# EAGLE board arduino_uno_with_rs232 (EAGLE 6.1)
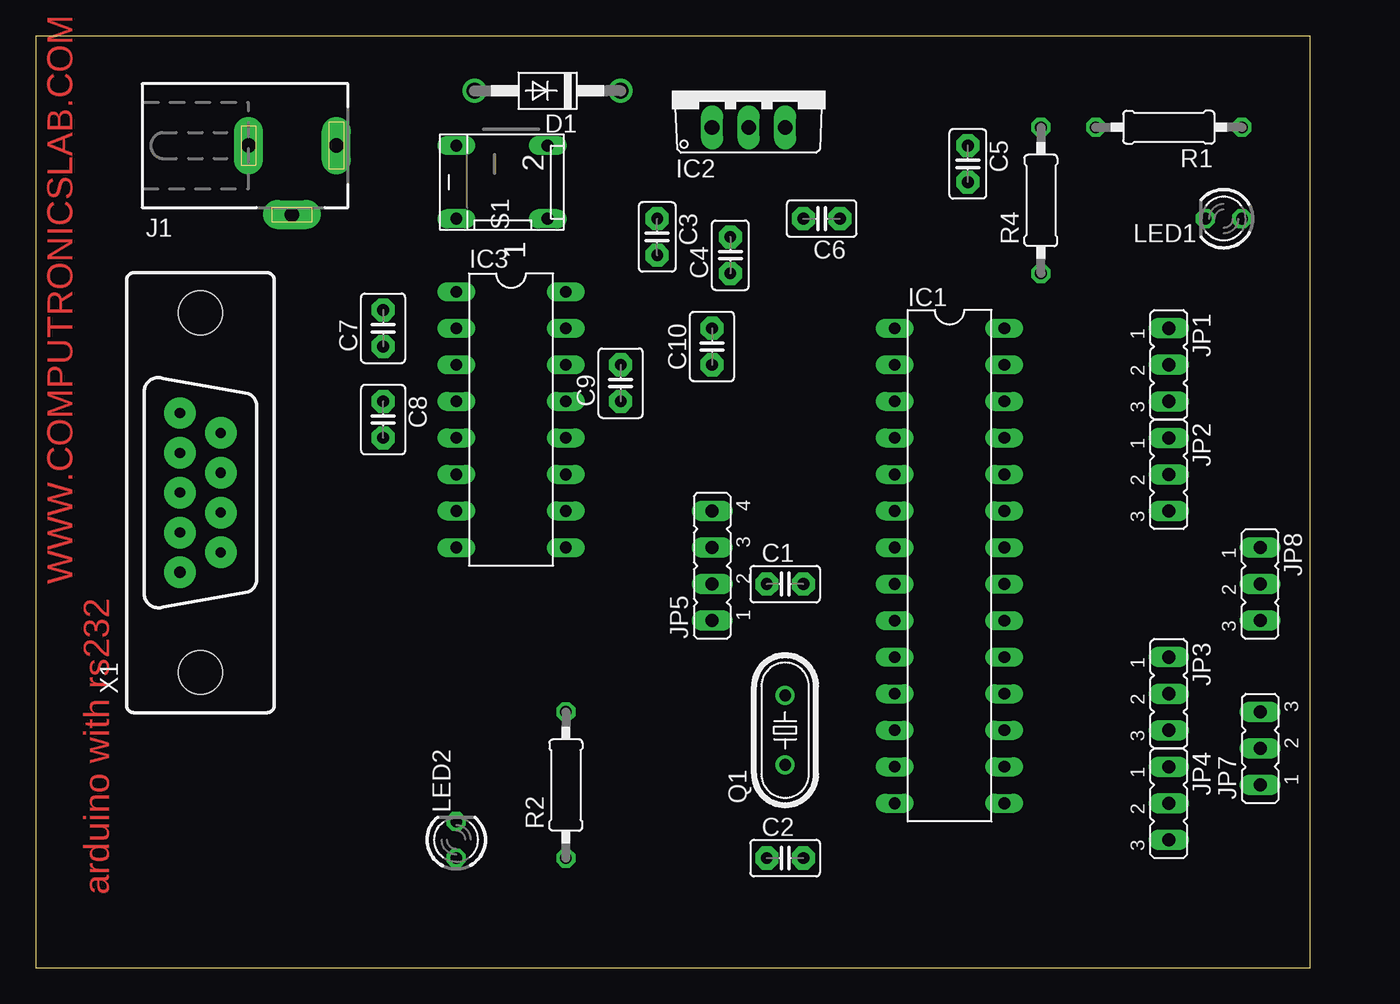
[diagram p0: board, top side]
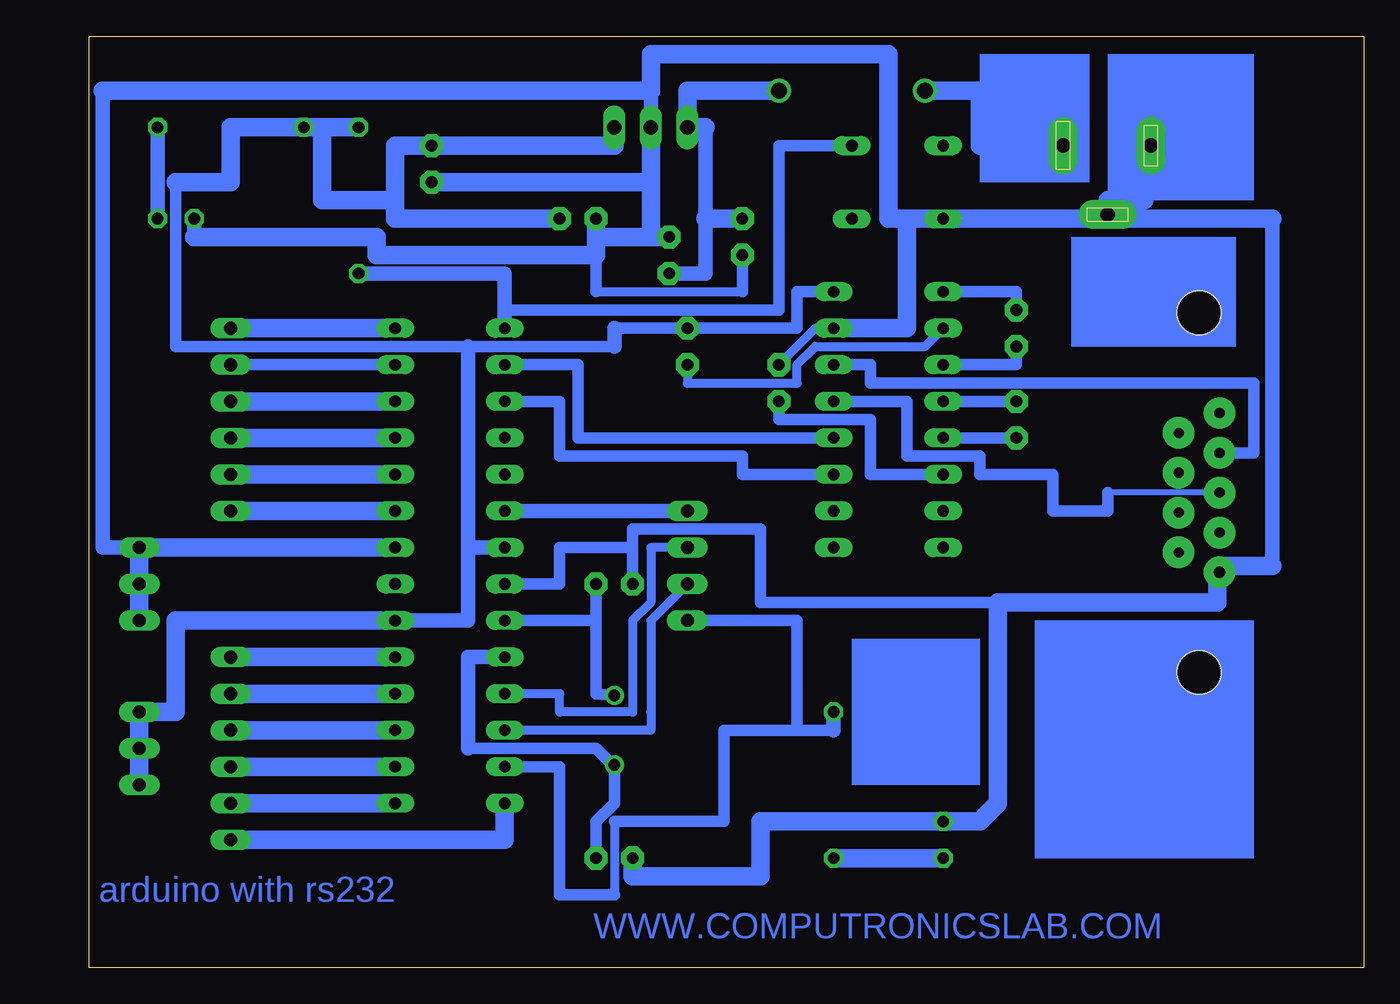
[diagram p1: board, bottom side, seen from below]

Size 88.57 x 64.76 mm. Coordinates in mm from the lower left corner, seen from the top.
Outline: 0,0 88.57,0 88.57,64.76 0,64.76 0,0
Copper layers (1*16): Top 0.035mm / dielectric 1.5mm / Bottom 0.035mm
Design rules: minimum track width 10mil, minimum drill 24mil, track to track 8mil, track to pad 8mil, pad to pad 8mil, via to via 8mil, smd to smd 8mil, copper to edge 40mil, drill to drill 8mil, minimum pad ring 10mil, minimum via ring 8mil, stop-mask expansion 4mil, vias tented up to drill 0mil, thermal gap 10mil

## Footprints (pad centres in the part's own frame; a part is rotated, then mirrored left to right if it is on the bottom)
C2.5-2 = drill 0.813 pad 1.6 octagon: 1 -1.27,0; 2 1.27,0
C2.5-3 = drill 0.813 pad 1.6 octagon: 1 -1.27,0; 2 1.27,0
DO41-10 = drill 1.118: A 5.08,0; C -5.08,0
DIL28-3 = drill 0.813 long: 1 -16.51,-3.81; 2 -13.97,-3.81; 3 -11.43,-3.81; 4 -8.89,-3.81; 5 -6.35,-3.81; 6 -3.81,-3.81; 7 -1.27,-3.81; 8 1.27,-3.81; 9 3.81,-3.81; 10 6.35,-3.81; 11 8.89,-3.81; 12 11.43,-3.81; 13 13.97,-3.81; 14 16.51,-3.81; 15 16.51,3.81; 16 13.97,3.81; 17 11.43,3.81; 18 8.89,3.81; 19 6.35,3.81; 20 3.81,3.81; 21 1.27,3.81; 22 -1.27,3.81; 23 -3.81,3.81; 24 -6.35,3.81; 25 -8.89,3.81; 26 -11.43,3.81; 27 -13.97,3.81; 28 -16.51,3.81
TO220V = drill 1.016 long: 1 -2.54,-2.54; 2 0,-2.54; 3 2.54,-2.54
DIL16 = drill 0.813 long: 1 -8.89,-3.81; 2 -6.35,-3.81; 3 -3.81,-3.81; 4 -1.27,-3.81; 5 1.27,-3.81; 6 3.81,-3.81; 7 6.35,-3.81; 8 8.89,-3.81; 9 8.89,3.81; 10 6.35,3.81; 11 3.81,3.81; 12 1.27,3.81; 13 -1.27,3.81; 14 -3.81,3.81; 15 -6.35,3.81; 16 -8.89,3.81
DCJ0303 = drill 1 pad 2 long: 1 0,3.1; 2 4.8,0; 3 0,-3
JP2 = drill 0.914 long: 1 -2.54,0; 2 0,0; 3 2.54,0
JP4 = drill 0.914 long: 1 -3.81,0; 2 -1.27,0; 3 1.27,0; 4 3.81,0
LED3MM = drill 0.813 octagon: A -1.27,0; K 1.27,0
HC49/S = drill 0.813: 1 -2.413,0; 2 2.413,0
0207/10 = drill 0.813 octagon: 1 -5.08,0; 2 5.08,0
DP-02 = drill 0.813 long: 1 -2.54,-2.54; 2 2.54,-2.54; 3 2.54,3.81; 4 -2.54,3.81
H2M09ST = drill 0.8 pad 2.184: 1 -5.537,1.422 | drill 0.7 pad 2.184: 2 -2.769,1.422; 3 0,1.422; 4 2.769,1.422; 5 5.537,1.422; 6 -4.153,-1.422; 7 -1.384,-1.422; 8 1.384,-1.422; 9 4.153,-1.422 | hole 3.048: -12.497,0; 12.497,0

## Placement (x,y rotation side)
C1  22pf  [C2.5-2]  52.07,26.67 0 top
C2  22pf  [C2.5-2]  52.07,7.62 0 top
C3  100UF  [C2.5-2]  43.18,50.8 270 top
C4  0.1uf  [C2.5-2]  48.26,49.53 90 top
C5  0.1uf  [C2.5-2]  64.77,55.88 270 top
C6  4.7uf  [C2.5-2]  54.61,52.07 180 top
C7  0.1uf  [C2.5-3]  24.13,44.45 90 top
C8  0.1uf  [C2.5-3]  24.13,38.1 270 top
C9  0.1uf  [C2.5-3]  40.64,40.64 90 top
C10  0.1uf  [C2.5-3]  46.99,43.18 90 top
D1  1N4007  [DO41-10]  35.56,60.96 180 top
IC1  ATMEGA328  [DIL28-3]  63.5,27.94 270 top
IC2  7805  [TO220V]  49.53,60.96 0 top
IC3  MAX232  [DIL16]  33.02,38.1 270 top
J1  [DCJ0303]  17.78,57.15 270 top
JP1  [JP2]  78.74,41.91 270 top
JP2  [JP2]  78.74,34.29 270 top
JP3  [JP2]  78.74,19.05 270 top
JP4  [JP2]  78.74,11.43 270 top
JP5  [JP4]  46.99,27.94 90 top
JP7  [JP2]  85.09,15.24 90 top
JP8  [JP2]  85.09,26.67 270 top
LED1  [LED3MM]  82.55,52.07 180 top
LED2  [LED3MM]  29.21,8.89 90 top
Q1  12MHZ  [HC49/S]  52.07,16.51 90 top
R1  220R  [0207/10]  78.74,58.42 180 top
R2  330R  [0207/10]  36.83,12.7 90 top
R4  10K  [0207/10]  69.85,53.34 90 top
S1  [DP-02]  33.02,54.61 90 top
X1  DB 9 FEMALE  [H2M09ST]  11.43,33.02 90 top

## Library data of the parts
C1-C10 = capacitor-wima
D1 = diode
IC1 = quantum-research-group; OC_FARNELL: unknown; OC_NEWARK: unknown
IC2 = linear
IC3 = maxim; MPN: MAX313EPE+; OC_FARNELL: unknown; OC_NEWARK: 99K3220
J1 = con-jack; OC_FARNELL: unknown; OC_NEWARK: unknown
JP1-JP5 JP7 JP8 = jumper
LED1 LED2 = led
Q1 = crystal; OC_FARNELL: 1667008; OC_NEWARK: unknown
R1 R2 R4 = rcl
S1 = switch-dil; MPN: MCDP02; OC_FARNELL: 1255233; OC_NEWARK: 26M1095
X1 = con-thomas-betts; OC_FARNELL: unknown; OC_NEWARK: unknown

## Nets
N$1: C1.2 IC1.9 Q1.2
N$2: C2.2 IC1.10 Q1.1
N$3: D1.A J1.1
N$6: LED1.A R1.1
N$7: C3.1 C4.1 D1.C IC2.1
N$8: IC1.28 JP1.1
N$9: IC1.27 JP1.2
N$10: IC1.26 JP1.3
N$11: IC1.25 JP2.1
N$12: IC1.24 JP2.2
N$13: IC1.23 JP2.3
N$18: IC1.6 JP5.4
N$19: IC1.12 JP5.2
N$20: IC1.11 JP5.3
N$21: IC1.13 JP5.1 R2.2
N$22: IC1.14 JP4.3
N$23: IC1.15 JP4.2
N$24: IC1.16 JP4.1
N$25: IC1.17 JP3.3
N$26: IC1.18 JP3.2
N$27: IC1.19 JP3.1
N$28: C7.2 IC3.1
N$29: C7.1 IC3.3
N$30: C8.1 IC3.4
N$31: IC1.1 R4.1 S1.2
N$32: LED2.A R2.1
N$33: C8.2 IC3.5
N$34: C9.1 IC3.6
N$35: C1.1 C2.1 C3.2 C4.2 C5.2 C6.2 C9.2 IC1.8 IC1.22 IC2.2 IC3.15 J1.2 J1.3 JP8.1 JP8.2 JP8.3 LED1.K LED2.K S1.4 X1.1
N$36: C10.1 IC3.2
N$37: C5.1 C6.1 C10.2 IC1.7 IC1.20 IC2.3 IC3.16 JP7.1 JP7.2 JP7.3 R1.2 R4.2
N$38: IC3.13 X1.3
N$39: IC3.14 X1.4
N$40: IC1.3 IC3.11
N$41: IC1.2 IC3.12

## Tracks (layer width: path | path; a pad name or v marks a point on that pad's centre or on a via)
N$1
  Bottom 0.813: Q1.2 53.34,19.05 C1.2 53.34,24.13 IC1.9
N$2
  Bottom 0.254: 52.07,13.97 Q1.1
  Bottom 0.813: C2.2 53.34,10.16 52.07,11.43 52.07,13.97 53.34,15.24 62.23,15.24
  Bottom 1.016: IC1.10 62.23,21.59 62.23,19.05 62.23,15.24
N$3
  Bottom 1.27: D1.A 26.67,60.96 26.67,57.15 J1.1
N$6
  Bottom 1.016: R1.1 LED1.A
N$7
  Bottom 0.254: 45.72,48.26 45.72,52.07
  Bottom 1.016: C4.1 46.99,48.26 45.72,48.26 45.72,58.42
  Bottom 1.27: D1.C 46.99,60.96 IC2.1 45.72,58.42 | 45.72,52.07 C3.1
N$8
  Bottom 1.27: JP1.1 IC1.28
N$9
  Bottom 0.813: JP1.2 IC1.27
N$10
  Bottom 1.27: JP1.3 IC1.26
N$11
  Bottom 1.27: JP2.1 IC1.25
N$12
  Bottom 1.27: JP2.2 IC1.24
N$13
  Bottom 1.27: JP2.3 IC1.23
N$18
  Bottom 1.016: JP5.4 IC1.6
N$19
  Bottom 0.61: IC1.12 50.8,16.51 49.53,16.51 49.53,17.78 49.53,24.13 JP5.2
N$20
  Bottom 0.61: IC1.11 55.88,19.05 55.88,17.78 50.8,17.78 50.8,24.13 49.53,25.4 49.53,29.21 JP5.3
N$21
  Bottom 0.61: 52.07,10.16 52.07,5.08
  Bottom 0.813: IC1.13 55.88,13.97 55.88,5.08 52.07,5.08 | 52.07,10.16 44.45,10.16 44.45,16.51 39.37,16.51 | 39.37,16.51 39.37,24.13 JP5.1 | 36.83,16.51 39.37,16.51
  Bottom 1.016: R2.2 36.83,16.51
N$22
  Bottom 1.27: IC1.14 59.69,10.16 59.69,8.89 62.23,8.89 JP4.3
N$23
  Bottom 1.27: JP4.2 IC1.15
N$24
  Bottom 1.27: JP4.1 IC1.16
N$25
  Bottom 1.27: JP3.3 IC1.17
N$26
  Bottom 1.27: JP3.2 IC1.18
N$27
  Bottom 1.27: JP3.1 IC1.19
N$28
  Bottom 0.813: IC3.1 24.13,46.99 C7.2
N$29
  Bottom 0.813: IC3.3 24.13,41.91 C7.1
N$30
  Bottom 0.813: C8.1 IC3.4
N$31
  Bottom 0.813: S1.2 40.64,57.15 40.64,45.72 59.69,45.72
  Bottom 1.016: IC1.1 59.69,45.72 59.69,46.99 59.69,48.26 62.23,48.26 R4.1
N$32
  Bottom 1.27: R2.1 LED2.A
N$33
  Bottom 0.813: C8.2 IC3.5
N$34
  Bottom 0.813: IC3.6 34.29,34.29 34.29,38.1 40.64,38.1 C9.1
N$35
  Bottom 0.254: S1.4 31.75,52.07 | 17.78,52.07 J1.2 | 10.16,27.94 X1.1
  Bottom 0.61: 53.34,46.99 43.18,46.99 | C9.2 38.1,44.45 IC3.15
  Bottom 0.813: 43.18,46.99 C3.2 | 53.34,50.8 53.34,46.99 | IC1.8 55.88,26.67 55.88,29.21 50.8,29.21 | C1.1 50.8,29.21 | 50.8,29.21 50.8,30.48 41.91,30.48 41.91,25.4 25.4,25.4
  Bottom 1.016: 81.28,50.8 LED1.K | 87.63,60.96 87.63,29.21 JP8.1 | IC2.2 49.53,60.96 | 6.35,27.94 6.35,52.07
  Bottom 1.27: JP8.3 JP8.2 JP8.1 IC1.22 | C4.2 49.53,50.8 | 49.53,50.8 53.34,50.8 | 53.34,50.8 53.34,49.53 68.58,49.53 68.58,50.8 81.28,50.8 | 49.53,50.8 49.53,54.61 | 49.53,54.61 IC2.2 | 53.34,50.8 C6.2 | 49.53,54.61 C5.2 | 87.63,60.96 49.53,60.96 49.53,63.5 33.02,63.5 33.02,52.07 S1.4 17.78,52.07 6.35,52.07 | J1.3 15.24,57.15 15.24,53.34 17.78,53.34 J1.2 | 31.75,52.07 31.75,44.45 IC3.15 | C2.1 50.8,6.35 41.91,6.35 41.91,10.16 LED2.K 26.67,10.16 25.4,11.43 25.4,25.4 10.16,25.4 10.16,26.67 X1.1 | 10.16,27.94 6.35,27.94
N$36
  Bottom 0.61: IC3.2 30.48,43.18 38.1,43.18 39.37,41.91 39.37,40.64 46.99,40.64 C10.1
N$37
  Bottom 0.813: IC3.16 39.37,46.99 39.37,44.45 C10.2 52.07,44.45 | 52.07,43.18 62.23,43.18 82.55,43.18 82.55,54.61
  Bottom 1.016: 62.23,29.21 62.23,24.13 IC1.20 | IC1.7 62.23,29.21 | 52.07,43.18 52.07,44.45 | 62.23,29.21 62.23,43.18
  Bottom 1.27: IC2.3 52.07,57.15 C5.1 67.31,57.15 67.31,53.34 | 72.39,58.42 R1.2 78.74,58.42 78.74,54.61 82.55,54.61 | 72.39,58.42 R4.2 | C6.1 67.31,52.07 67.31,53.34 | 72.39,58.42 72.39,53.34 67.31,53.34 | JP7.1 JP7.2 JP7.3 82.55,17.78 82.55,24.13 IC1.20
N$38
  Bottom 0.406: X1.3 17.78,33.02
  Bottom 0.813: IC3.13 31.75,39.37 31.75,35.56 26.67,35.56 26.67,34.29 21.59,34.29 21.59,33.02 21.59,31.75 17.78,31.75 17.78,33.02
N$39
  Bottom 0.254: 7.62,35.56 7.62,35.79
  Bottom 0.813: IC3.14 34.29,41.91 34.29,40.64 15.24,40.64 7.62,40.64 7.62,35.79 X1.4
N$40
  Bottom 0.813: IC3.11 43.18,34.29 43.18,35.56 55.88,35.56 55.88,39.37 IC1.3
N$41
  Bottom 0.813: IC3.12 54.61,36.83 54.61,41.91 IC1.2
(copper drawn outside any net)
  shapes: Bottom area x5

## Text on the board
Top: WWW.COMPUTRONICSLAB.COM | arduino with rs232
Bottom: arduino with rs232 | WWW.COMPUTRONICSLAB.COM